# Altium PCB pay-optical.PcbDoc (part 6 of 6)
Units mm, origin at the board's own origin, x right, y up, seen from the top; angles counter-clockwise.
Board outline 128 x 54 mm, 4 copper layers (Top Layer, GND, VCC, Bottom Layer), stack 0.778 mm thick; 459 components, 246 nets, 1364 pads, 496 vias.
Unrouted connection lines stored in the file: 133.
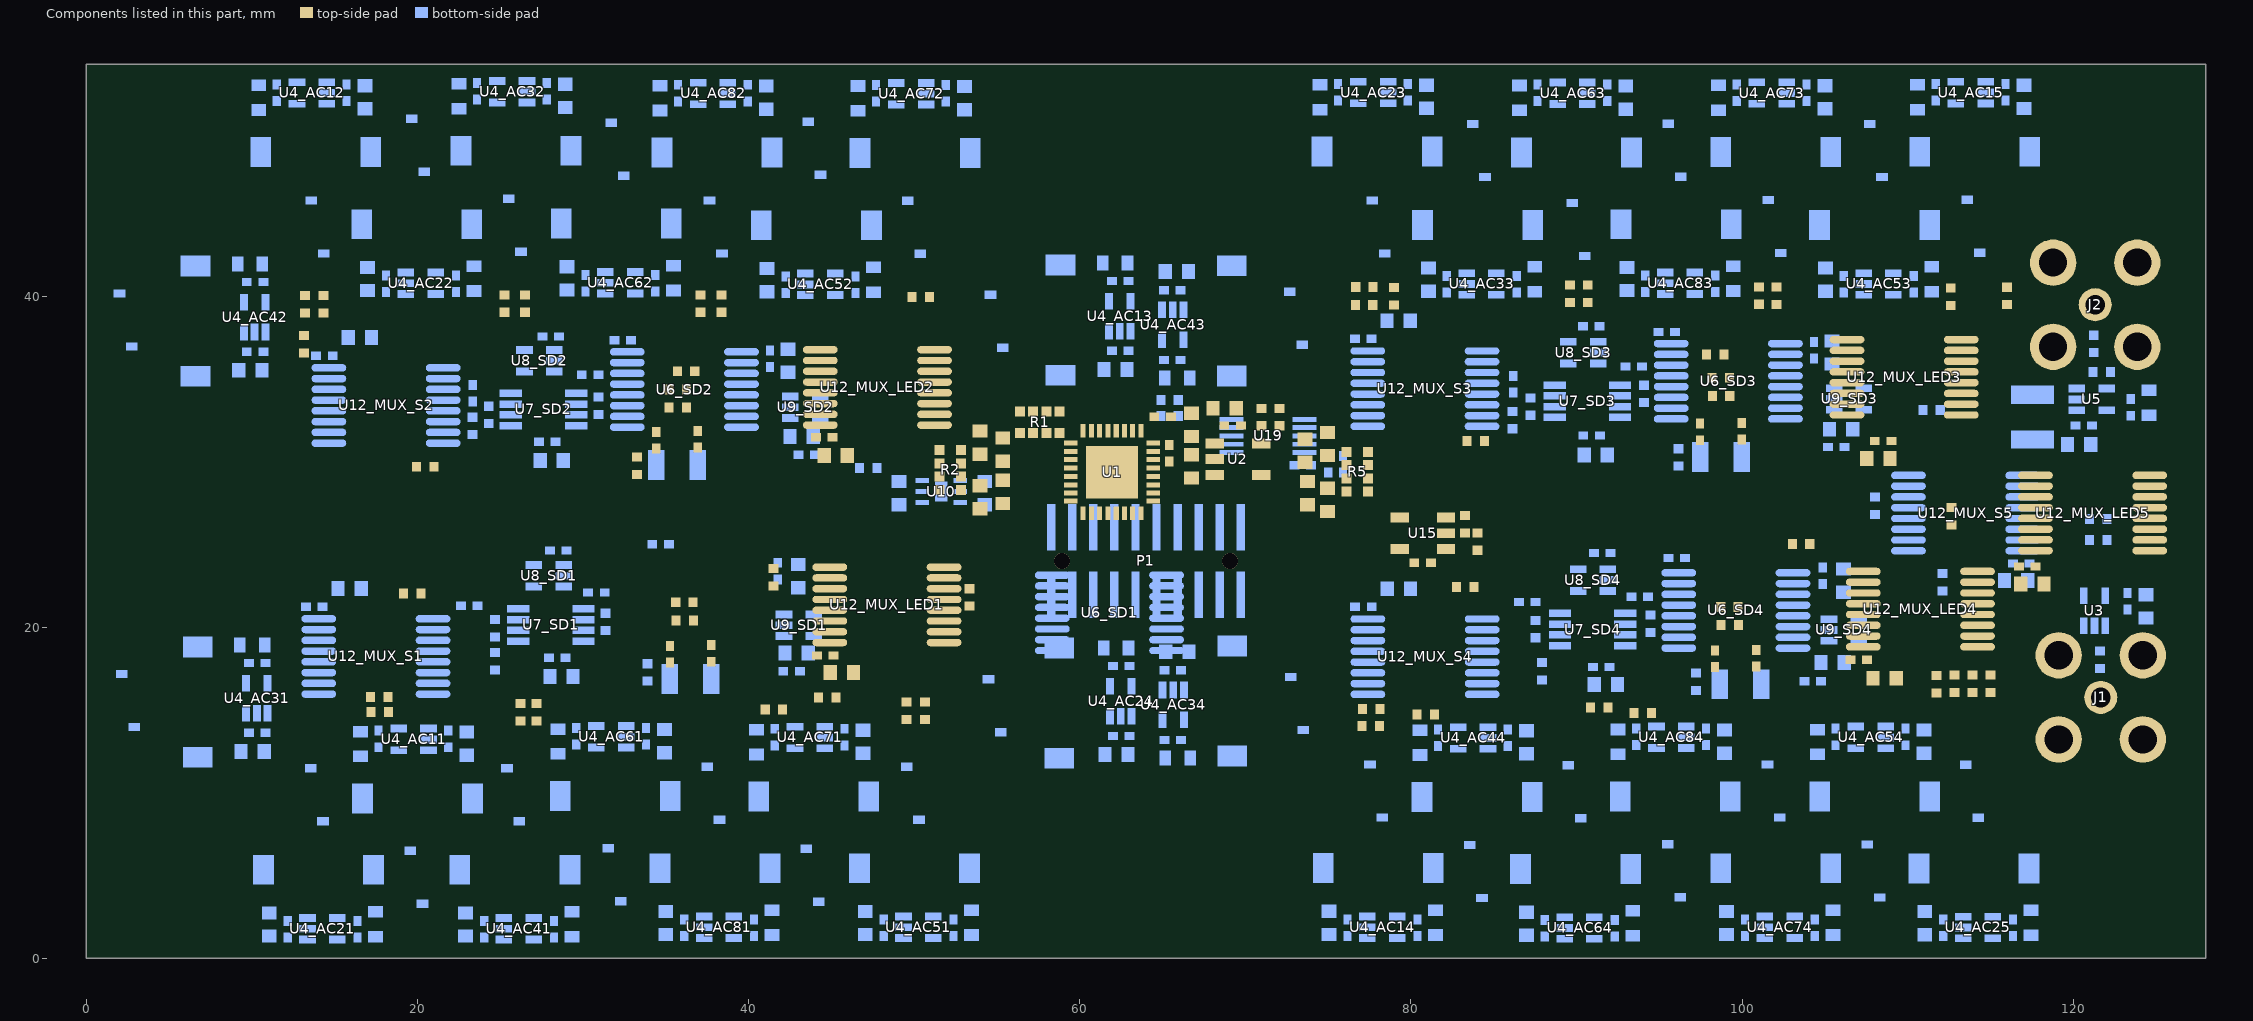
[diagram p7: the components of this part, seen from the top]

## Silkscreen, mask and mechanical layers (free items; w line width, h text height) (continued)
Mechanical 1:
  circle w0.254: c114,7.5 r2.5
  circle w0.254: c38.056,46.551 r2.5
  circle w0.254: c70,38.5 r2.5
  circle w0.254: c70,15.5 r2.5
  circle w0.254: c58,38.5 r2.5
  circle w0.254: c58,15.5 r2.5
  circle w0.254: c6,15.5 r2.5
  circle w0.254: c6,38.5 r2.5
  circle w0.254: c78,7.5 r2.5
  circle w0.254: c84,7.5 r2.5
  circle w0.254: c90,7.5 r2.5
  circle w0.254: c96,7.5 r2.5
  circle w0.254: c102,7.5 r2.5
  circle w0.254: c108,7.5 r2.5
  circle w0.254: c114,46.5 r2.5
  circle w0.254: c108,46.5 r2.5
  circle w0.254: c102,46.5 r2.5
  circle w0.254: c96,46.5 r2.5
  circle w0.254: c90,46.5 r2.5
  circle w0.254: c84,46.5 r2.5
  circle w0.254: c78,46.5 r2.5
  circle w0.254: c14,46.5 r2.5
  circle w0.254: c20,46.5 r2.5
  circle w0.254: c26,46.5 r2.5
  circle w0.254: c32,46.5 r2.5
  circle w0.254: c21.744,43.554 r2.5
  circle w0.254: c44,46.5 r2.5
  circle w0.254: c50,46.5 r2.5
  circle w0.254: c50,7.5 r2.5
  circle w0.254: c44,7.5 r2.5
  circle w0.254: c38,7.5 r2.5
  circle w0.254: c32,7.5 r2.5
  circle w0.254: c26,7.5 r2.5
  circle w0.254: c20,7.5 r2.5
  circle w0.254: c14,7.5 r2.5
  lines w0.254: 0.1,27 128.02,28.78 ; 8.249,46.5 118.449,46.5 ; 11.5,7.5 121.7,7.6
Route Tool Path:
  the board outline again, w0.254

## Text inside footprints (layer, text, board x,y; h text height)
D2_AC11: Mechanical 1 "CUT OUT" at 21.633,9.836 h0.75 r180
D2_AC12: Mechanical 1 "CUT OUT" at 15.493,48.872 h0.75 r180
D2_AC13: Mechanical 1 "CUT OUT" at 59.023,36.921 h0.75 r90
D2_AC14: Mechanical 1 "CUT OUT" at 76.405,5.275 h0.75
D2_AC15: Mechanical 1 "CUT OUT" at 115.675,48.896 h0.75 r180
D2_AC21: Mechanical 1 "CUT OUT" at 12.402,5.18 h0.75
D2_AC22: Mechanical 1 "CUT OUT" at 18.34,44.162 h0.75
D2_AC23: Mechanical 1 "CUT OUT" at 79.579,48.901 h0.75 r180
D2_AC24: Mechanical 1 "CUT OUT" at 58.942,13.792 h0.75 r90
D2_AC25: Mechanical 1 "CUT OUT" at 112.378,5.258 h0.75
D2_AC31: Mechanical 1 "CUT OUT" at 6.916,13.85 h0.75 r90
D2_AC32: Mechanical 1 "CUT OUT" at 27.582,48.954 h0.75 r180
D2_AC33: Mechanical 1 "CUT OUT" at 82.4,44.12 h0.75
D2_AC34: Mechanical 1 "CUT OUT" at 69.031,17.172 h0.75 r270
D2_AC41: Mechanical 1 "CUT OUT" at 24.264,5.18 h0.75
D2_AC42: Mechanical 1 "CUT OUT" at 6.781,36.864 h0.75 r90
D2_AC43: Mechanical 1 "CUT OUT" at 69.001,40.125 h0.75 r270
D2_AC44: Mechanical 1 "CUT OUT" at 85.618,9.921 h0.75 r180
D2_AC51: Mechanical 1 "CUT OUT" at 48.394,5.273 h0.75
D2_AC52: Mechanical 1 "CUT OUT" at 42.471,44.094 h0.75
D2_AC53: Mechanical 1 "CUT OUT" at 106.373,44.12 h0.75
D2_AC54: Mechanical 1 "CUT OUT" at 109.63,9.957 h0.75 r180
D2_AC61: Mechanical 1 "CUT OUT" at 33.577,9.991 h0.75 r180
D2_AC62: Mechanical 1 "CUT OUT" at 30.381,44.196 h0.75
D2_AC63: Mechanical 1 "CUT OUT" at 91.622,48.853 h0.75 r180
D2_AC64: Mechanical 1 "CUT OUT" at 88.318,5.227 h0.75
D2_AC71: Mechanical 1 "CUT OUT" at 45.566,9.952 h0.75 r180
D2_AC72: Mechanical 1 "CUT OUT" at 51.681,48.824 h0.75 r180
D2_AC73: Mechanical 1 "CUT OUT" at 103.655,48.87 h0.75 r180
D2_AC74: Mechanical 1 "CUT OUT" at 100.408,5.273 h0.75
D2_AC81: Mechanical 1 "CUT OUT" at 36.348,5.273 h0.75
D2_AC82: Mechanical 1 "CUT OUT" at 39.717,48.844 h0.75 r180
D2_AC83: Mechanical 1 "CUT OUT" at 94.386,44.163 h0.75
D2_AC84: Mechanical 1 "CUT OUT" at 97.59,9.963 h0.75 r180
P1: Bottom Overlay "2" at 57.142,25.448 h0.75; Bottom Overlay "1" at 57.142,21.282 h0.75; Bottom Overlay "20" at 72.128,25.448 h0.75; Bottom Overlay "19" at 72.111,21.304 h0.75; Mechanical 13 "2" at 57.142,25.448 h0.75; Mechanical 13 "1" at 57.142,21.282 h0.75; Mechanical 13 "20" at 72.128,25.448 h0.75; Mechanical 13 "19" at 72.128,21.282 h0.75